# Altium PCB PCB1.PcbDoc
Units mm, origin at the board's own origin, x right, y up, seen from the top; angles counter-clockwise.
Board outline 50.04 x 50.04 mm, 2 copper layers (Top Layer, Bottom Layer); 16 components, 12 nets, 40 pads, 0 vias.
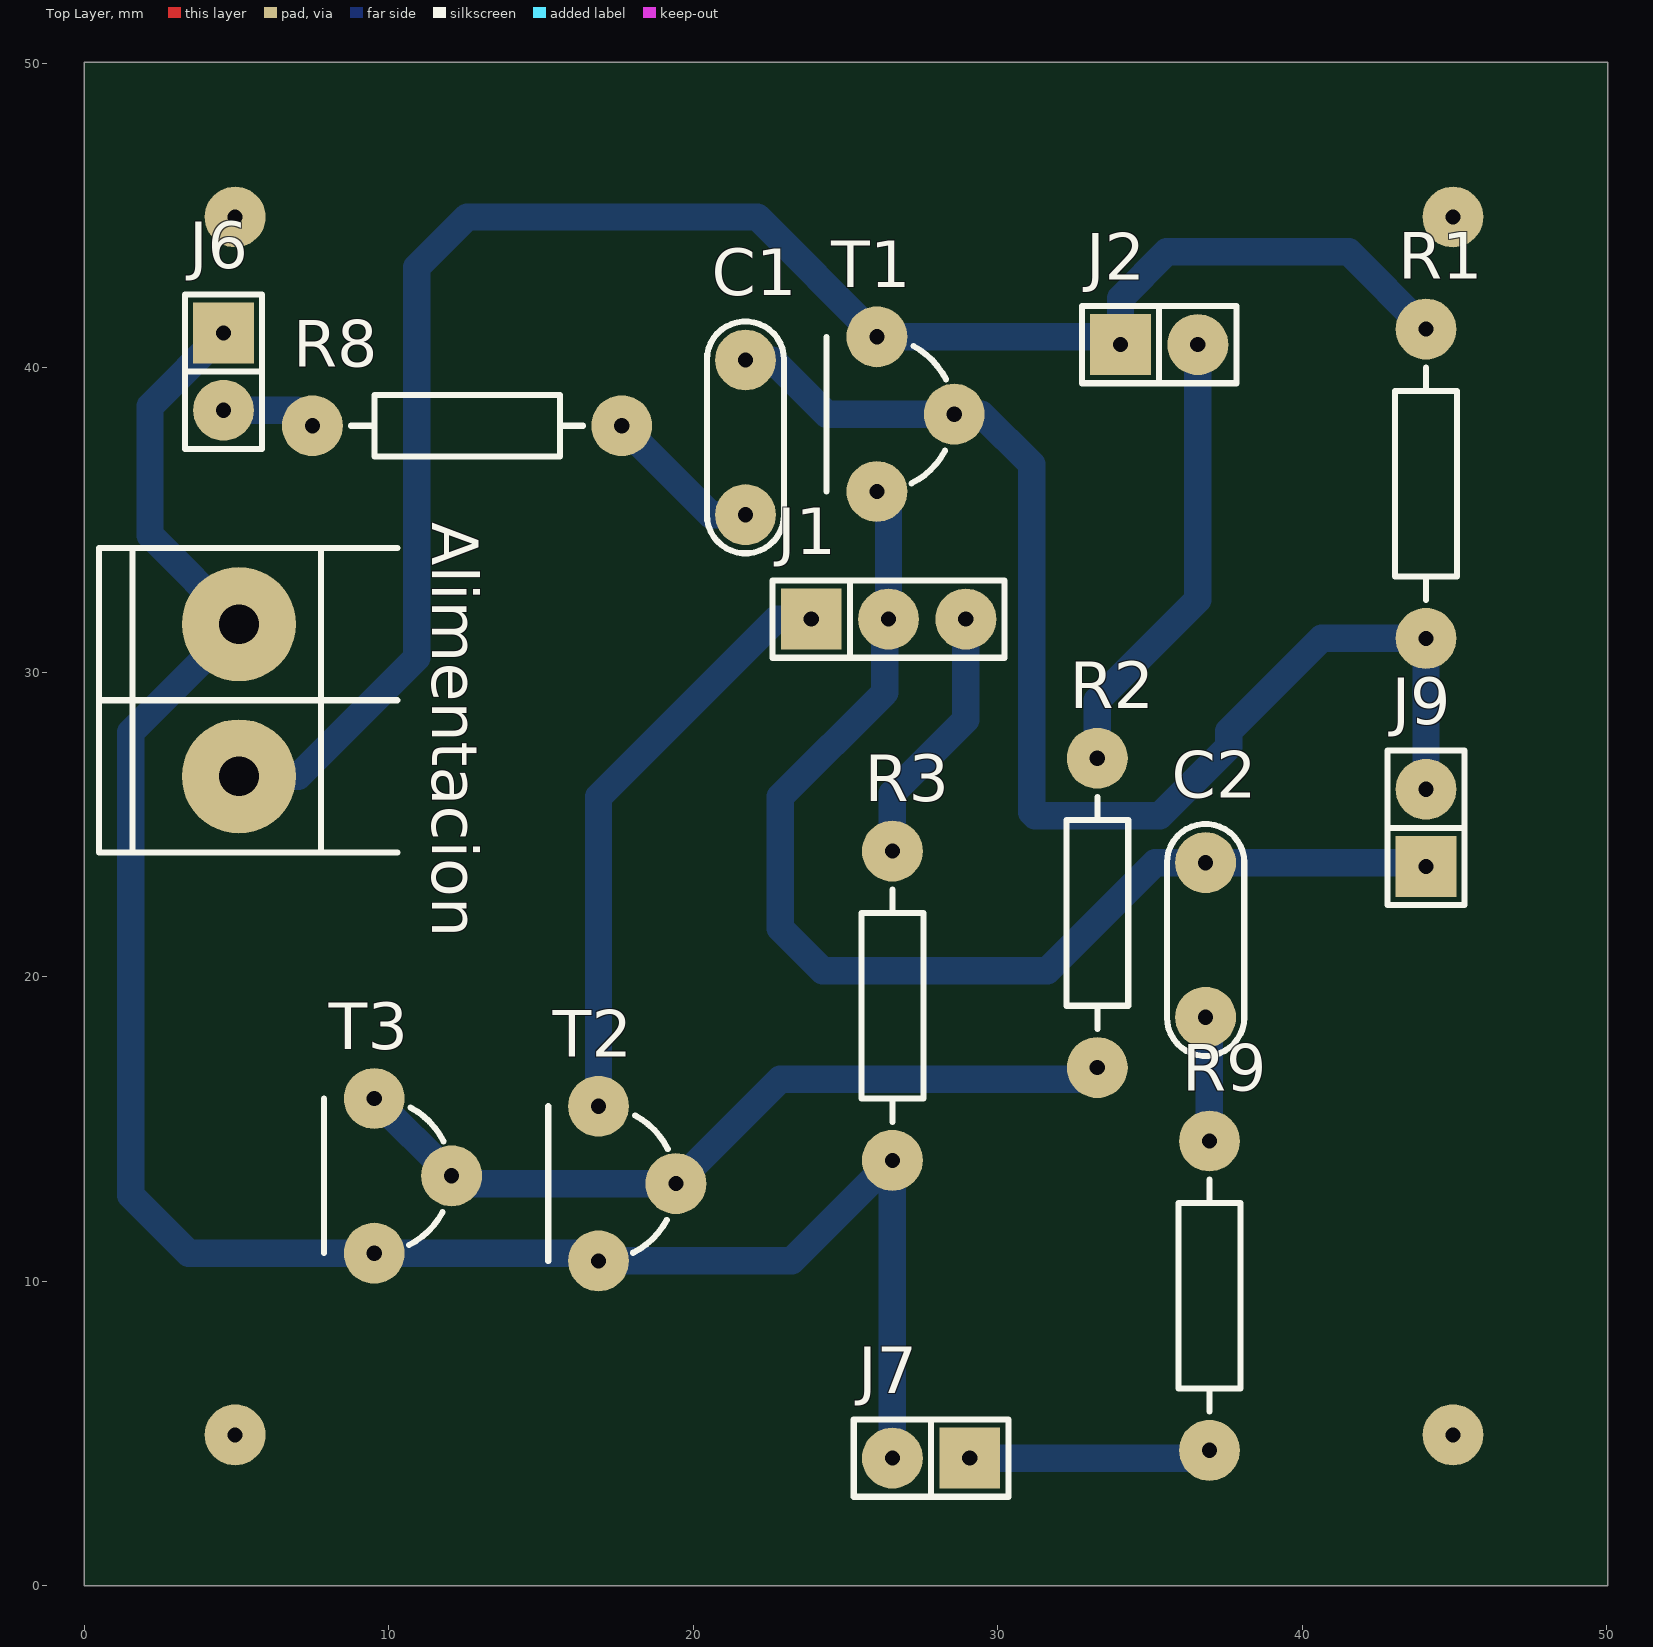
[diagram p0: Top Layer view]
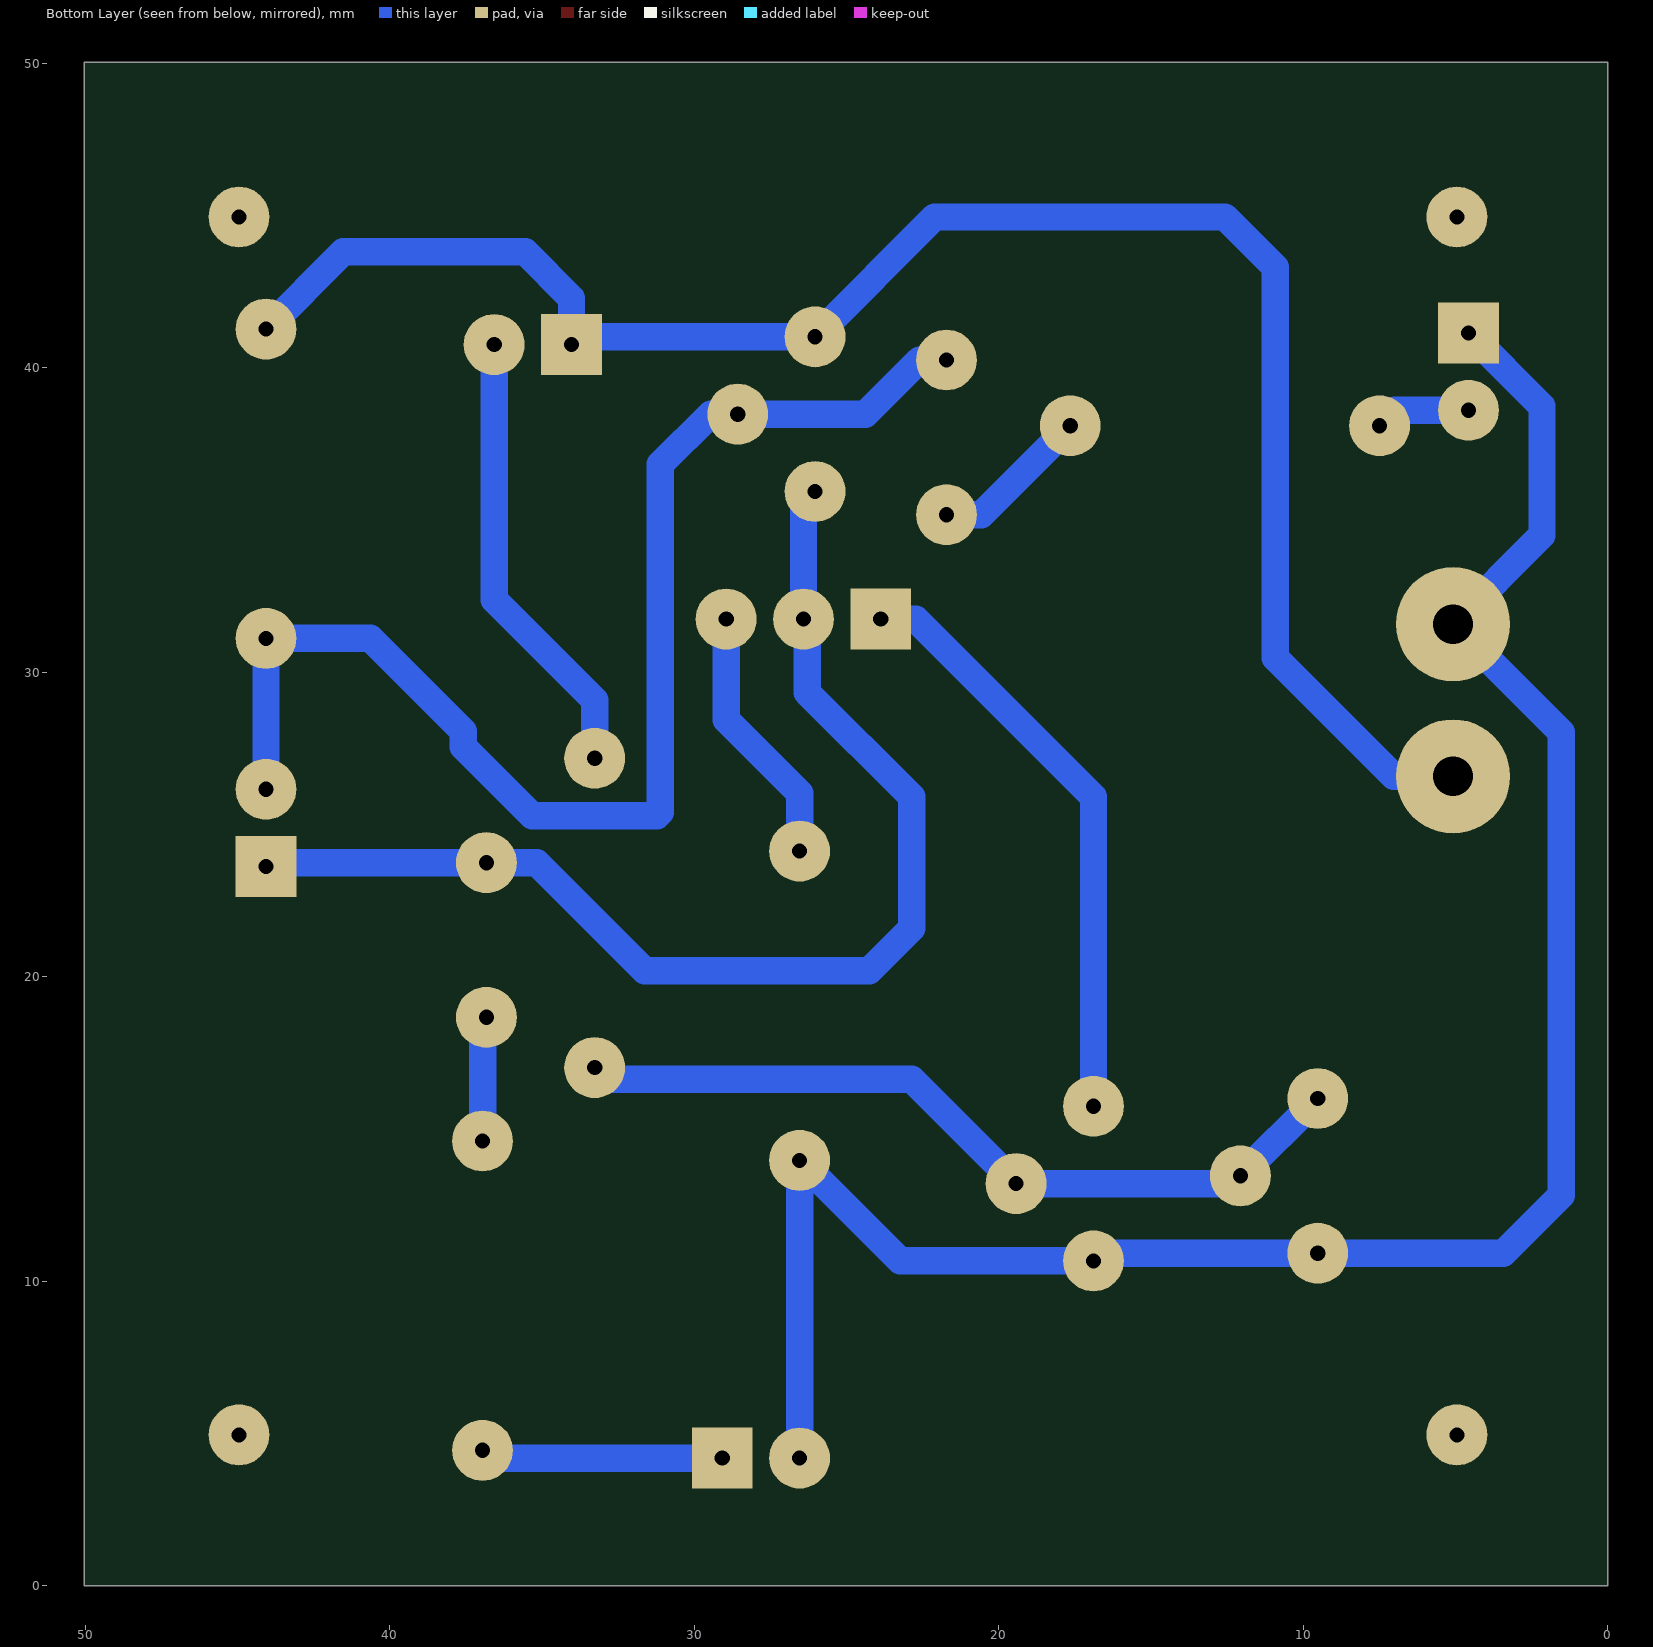
[diagram p1: Bottom Layer view, seen from below]
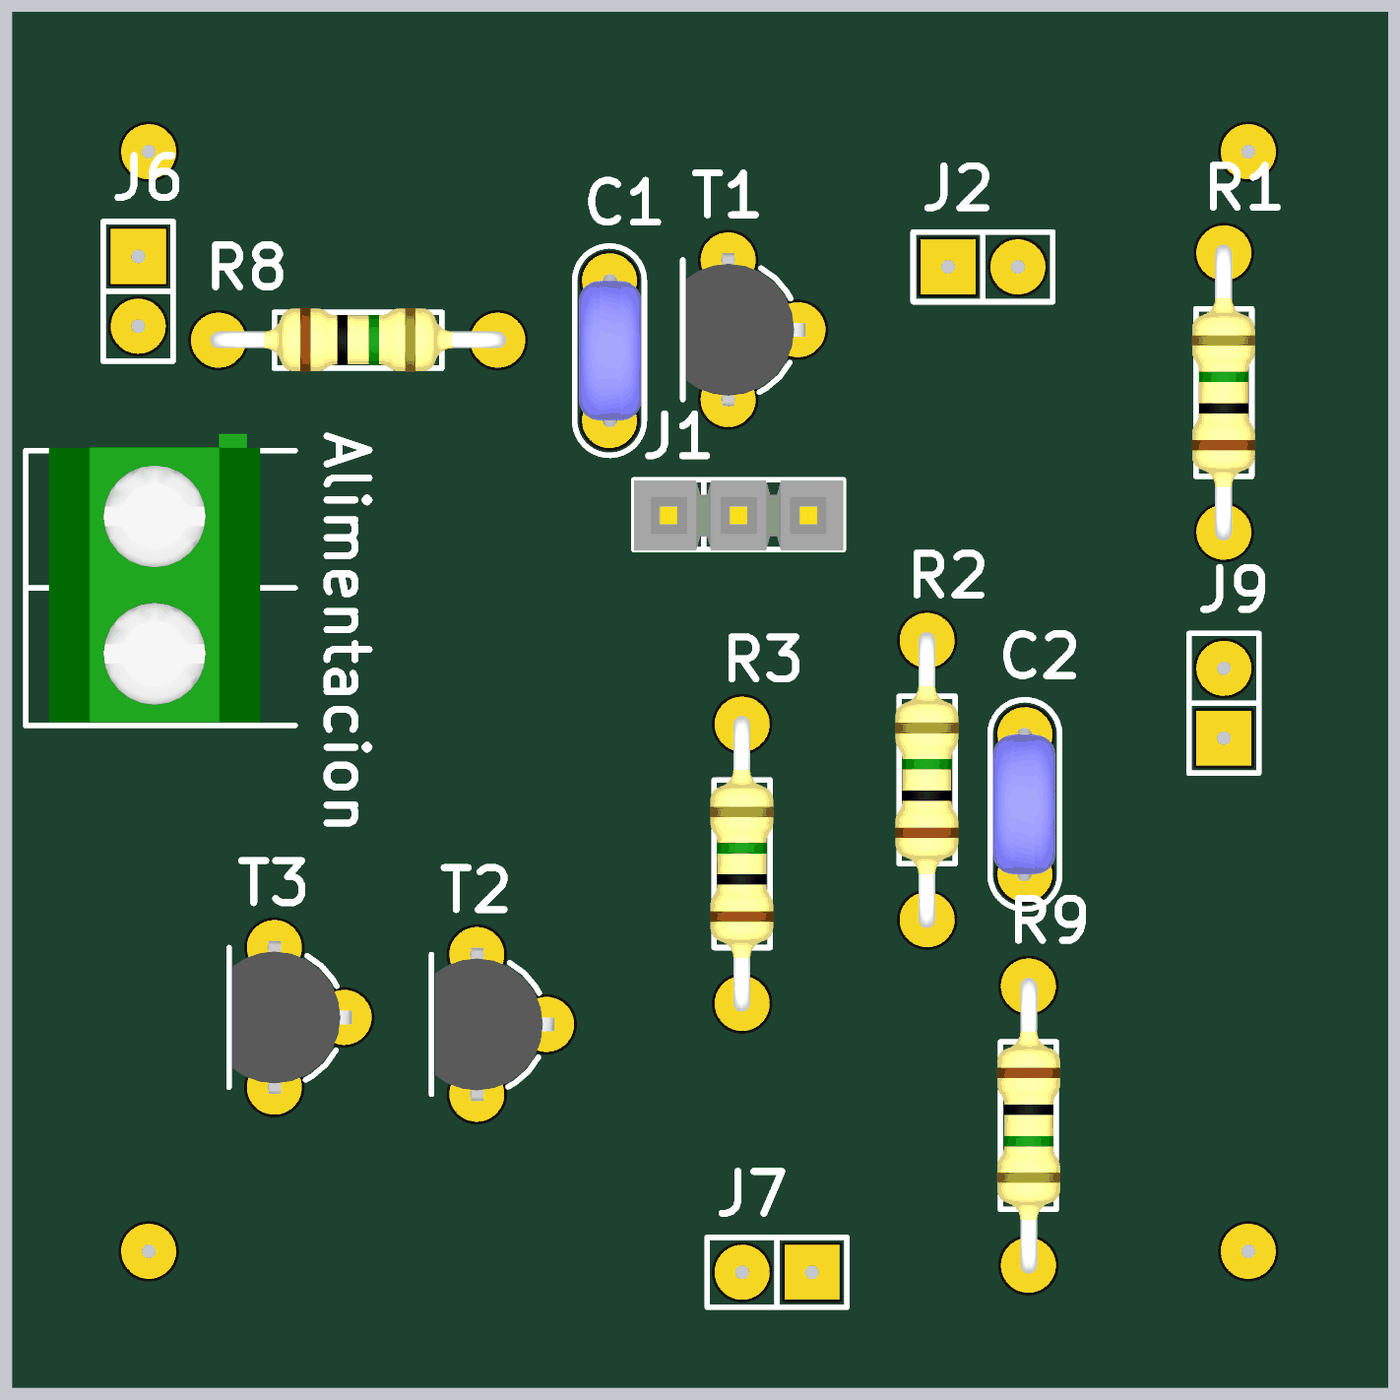
[diagram p2: 3D render of the assembled board from above, using the file's embedded part models]

## Layer stack, top to bottom
Top Solder: solder mask 0.0102, Solder Resist, Dk 3.5
Top Layer: signal copper 0.0356
Dielectric 1: dielectric 0.32, FR-4, Dk 4.8
Bottom Layer: signal copper 0.0356
Bottom Solder: solder mask 0.0102, Solder Resist, Dk 3.5

## Board outline
0,0 0,50.038 50.038,50.038 50.038,0

## Design rules (kind name [scope] priority, off if disabled: settings)
Clearance [All] p1: gap=0.3 ignorepadtopadclearanceinfootprint=FALSE
PolygonConnect [All] p1: connectstyle=Relief reliefconductorwidth=0.254 reliefentries=4 polygonreliefangle="90 Angle" airgapwidth=0.254
RoutingVias [All] p1: holewidth=0.711 width=1.27 viastyle="Through Hole" minholewidth=0.711 minwidth=1.27 maxholewidth=0.711 maxwidth=1.27
SolderMaskExpansion [All] p1: expansion=0.102
Width [All] p1: maxlimit=0.9 minlimit=0.9 preferedwidth=0.9
30 further rules are at their usual default settings.

## Components (designator, comment, footprint, x,y, rotation, side; value= is the part's Value field where it differs from the comment)
Alimentacion "BORNERA 2" BORNERA2 5.08,29.083 r0 top
C1 "CAP" CAP200 21.717,37.719 r90 top
C2 "CAP" CAP200 36.83,21.209 r270 top
J1 "CON3" SIP3 26.416,31.75 r0 top
J2 "CON2" SIP2 35.306,40.767 r0 top
J6 "CON2" SIP2 4.572,39.878 r270 top
J7 "CON2" SIP2 27.813,4.191 r180 top
J9 "CON2" SIP2 44.069,24.892 r90 top
R1 "RES" RES400 44.069,31.115 r90 top
R2 "RES" RES400 33.274,17.018 r90 top
R3 "RES" RES400 26.543,13.97 r90 top
R8 "RES" RES400 7.493,38.1 r0 top
R9 "RES" RES400 36.957,14.605 r270 top
T1 "TRANSISTOR NPN" TO92 27.305,38.481 r90 top
T2 "TRANSISTOR NPN" TO92 18.161,13.208 r90 top
T3 "TRANSISTOR NPN" TO92 10.795,13.462 r90 top

## Footprints (in the part's own frame and the unit in brackets; to place one, negate y for a bottom-side part, rotate by r counter-clockwise, add the part's x,y. Pads: shape width x height; smd on the part's side, far side on the other; paste and mask are expansions set on the pad)
BORNERA2 [mm] "Bornera con Tornillos 5mm separación"
  round 3.75 hole 1.3: 1(0,2.5) 2(0,-2.5)
  silkscreen extent -4.6,-5 5.2,5, body extent -3.76,-4.89 3.94,5.61, height 10
CAP200 [mm]
  round 2 hole 0.5: 1(-2.54,0) 2(2.54,0)
  silkscreen extent -3.81,-1.27 3.81,1.27, body extent -2.79,-1.17 2.79,1.12, height 6.24
RES400 [mm]
  round 2 hole 0.5: 1(0,0) 2(10.16,0)
  silkscreen extent 1.27,-1.02 8.89,1.02, body extent -0.3,-1.14 10.46,1.17, height 2.43
SIP2 [mm]
  rect 2x2 hole 0.5: 1(-1.27,0)
  round 2 hole 0.5: 2(1.27,0)
  silkscreen extent -2.54,-1.27 2.54,1.27
SIP3 [mm]
  rect 2x2 hole 0.5: 1(-2.54,0)
  round 2 hole 0.5: 2(0,0) 3(2.54,0)
  silkscreen extent -3.81,-1.27 3.81,1.27, body extent -3.81,-1.3 3.81,1.24, height 8.38
TO92 [mm]
  round 2 hole 0.5: 1(0,-1.27) 2(2.54,1.27) 3(-2.54,1.27)
  silkscreen extent -2.54,-1 2.54,2.92, body extent -2.79,-1.55 2.79,2.79, height 8

## Free pads (board coordinates)
  round 2 hole 0.5: 2(44.958,4.953) 3(44.958,44.958) 4(4.953,44.958) 5(4.953,4.953)

## Nets (pads, with @x,y where several pads share a name; then routed paths per layer and width w, separated by ;. In a path a pad name is that pad's centre, name@x,y a point inside that pad or via, vN(x,y) a via of type N, cw(c..) or ccw(c..) an arc to the next point about the centre after c; other vN are vias at no path point)
GND: Alimentacion.1 J6.1 J7.2 R3.1 T2.3 T3.3 | length 69.1
  Bottom Layer w0.9: J6.1 2.159,38.735 2.159,34.504 Alimentacion.1 1.524,28.027 1.524,12.827 3.429,10.922 T3.3 16.637,10.922 T2.3 23.241,10.668 R3.1 J7.2
NetC1_1: C1.1 R8.2 | length 5.3
  Bottom Layer w0.9: R8.2 20.574,35.179 C1.1
NetC2_2: C2.2 R9.1 | length 4.1
  Bottom Layer w0.9: C2.2 36.957,18.542 R9.1
NetJ1_1: J1.1 T2.2 | length 19.6
  Bottom Layer w0.9: T2.2 16.891,25.908 22.733,31.75 J1.1
NetJ1_3: J1.3 R3.2 | length 8.6
  Bottom Layer w0.9: R3.2 26.543,26.035 28.956,28.448 J1.3
NetJ2_2: J2.2 R2.2 | length 15
  Bottom Layer w0.9: R2.2 33.274,29.083 36.576,32.385 J2.2
NetJ6_2: J6.2 R8.1 | length 3.1
  Bottom Layer w0.9: J6.2 6.985,38.608 R8.1
NetJ7_1: J7.1 R9.2 | length 8
  Bottom Layer w0.9: J7.1 36.449,4.191 36.703,4.445 R9.2
NetR2_1: R2.1 T2.1 T3.1 T3.2 | length 26.5
  Bottom Layer w0.9: T3.2 T3.1 12.319,13.208 T2.1 22.86,16.637 32.893,16.637 R2.1
VCC: Alimentacion.2 J2.1 R1.2 T1.2 | length 59.1
  Bottom Layer w0.9: Alimentacion.2 7.025,26.583 10.922,30.48 10.922,43.307 12.573,44.958 22.098,44.958 T1.2 33.782,41.021 J2.1 34.036,42.291 35.56,43.815 41.529,43.815 R1.2
vi: C1.2 J9.2 R1.1 T1.1 | length 42.9
  Bottom Layer w0.9: C1.2 22.606,40.259 24.384,38.481 T1.1 29.464,38.481 31.115,36.83 31.115,25.4 31.229,25.286 35.319,25.286 37.592,27.559 37.592,28.067 40.64,31.115 R1.1 J9.2
vo: C2.1 J1.2 J9.1 T1.3 | length 39.3
  Bottom Layer w0.9: T1.3 26.416,35.56 J1.2 26.289,31.623 26.289,29.337 22.86,25.908 22.86,21.59 24.257,20.193 31.623,20.193 35.179,23.749 C2.1 43.942,23.749 J9.1